# Altium PCB Sheet1.PcbDoc
Units mil, origin at the board's own origin, x right, y up, seen from the top; angles counter-clockwise.
Board outline 6000 x 4000 mil, 2 copper layers (Top Layer, Bottom Layer); 5 components, 36 nets, 92 pads, 16 vias.
Unrouted connection lines stored in the file: 10.
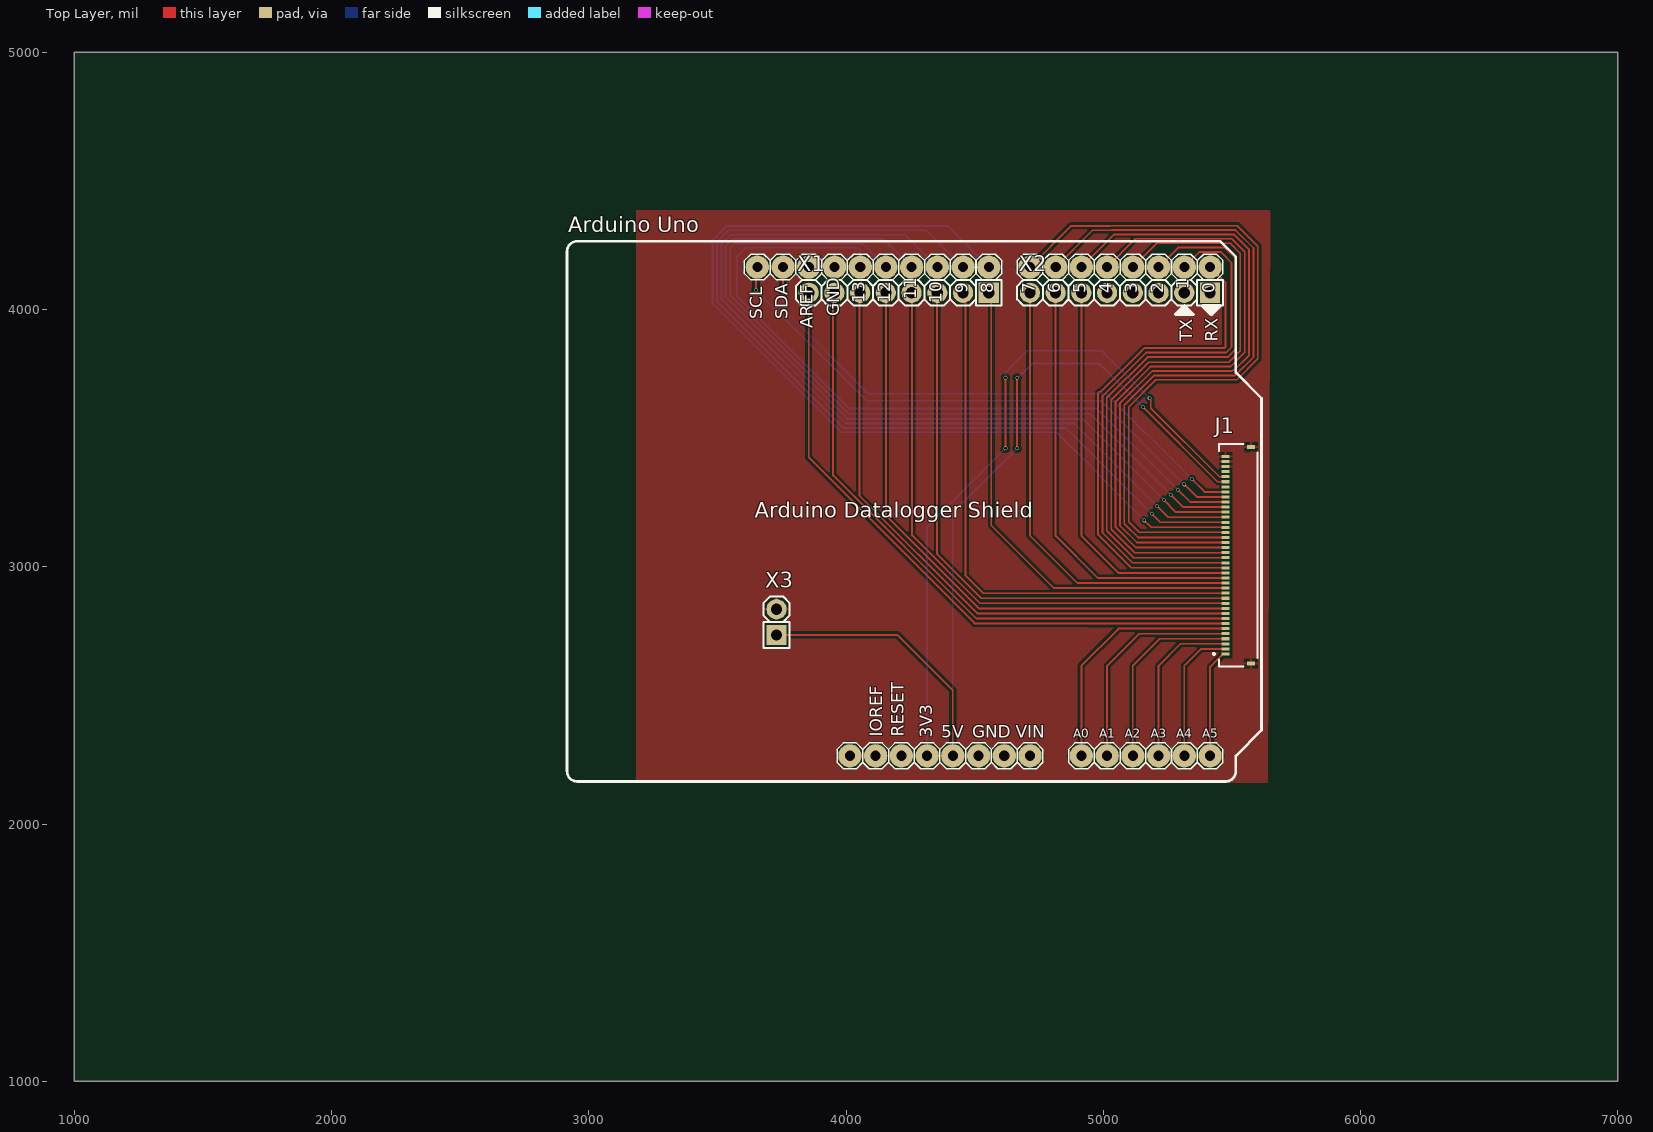
[diagram p0: Top Layer view]
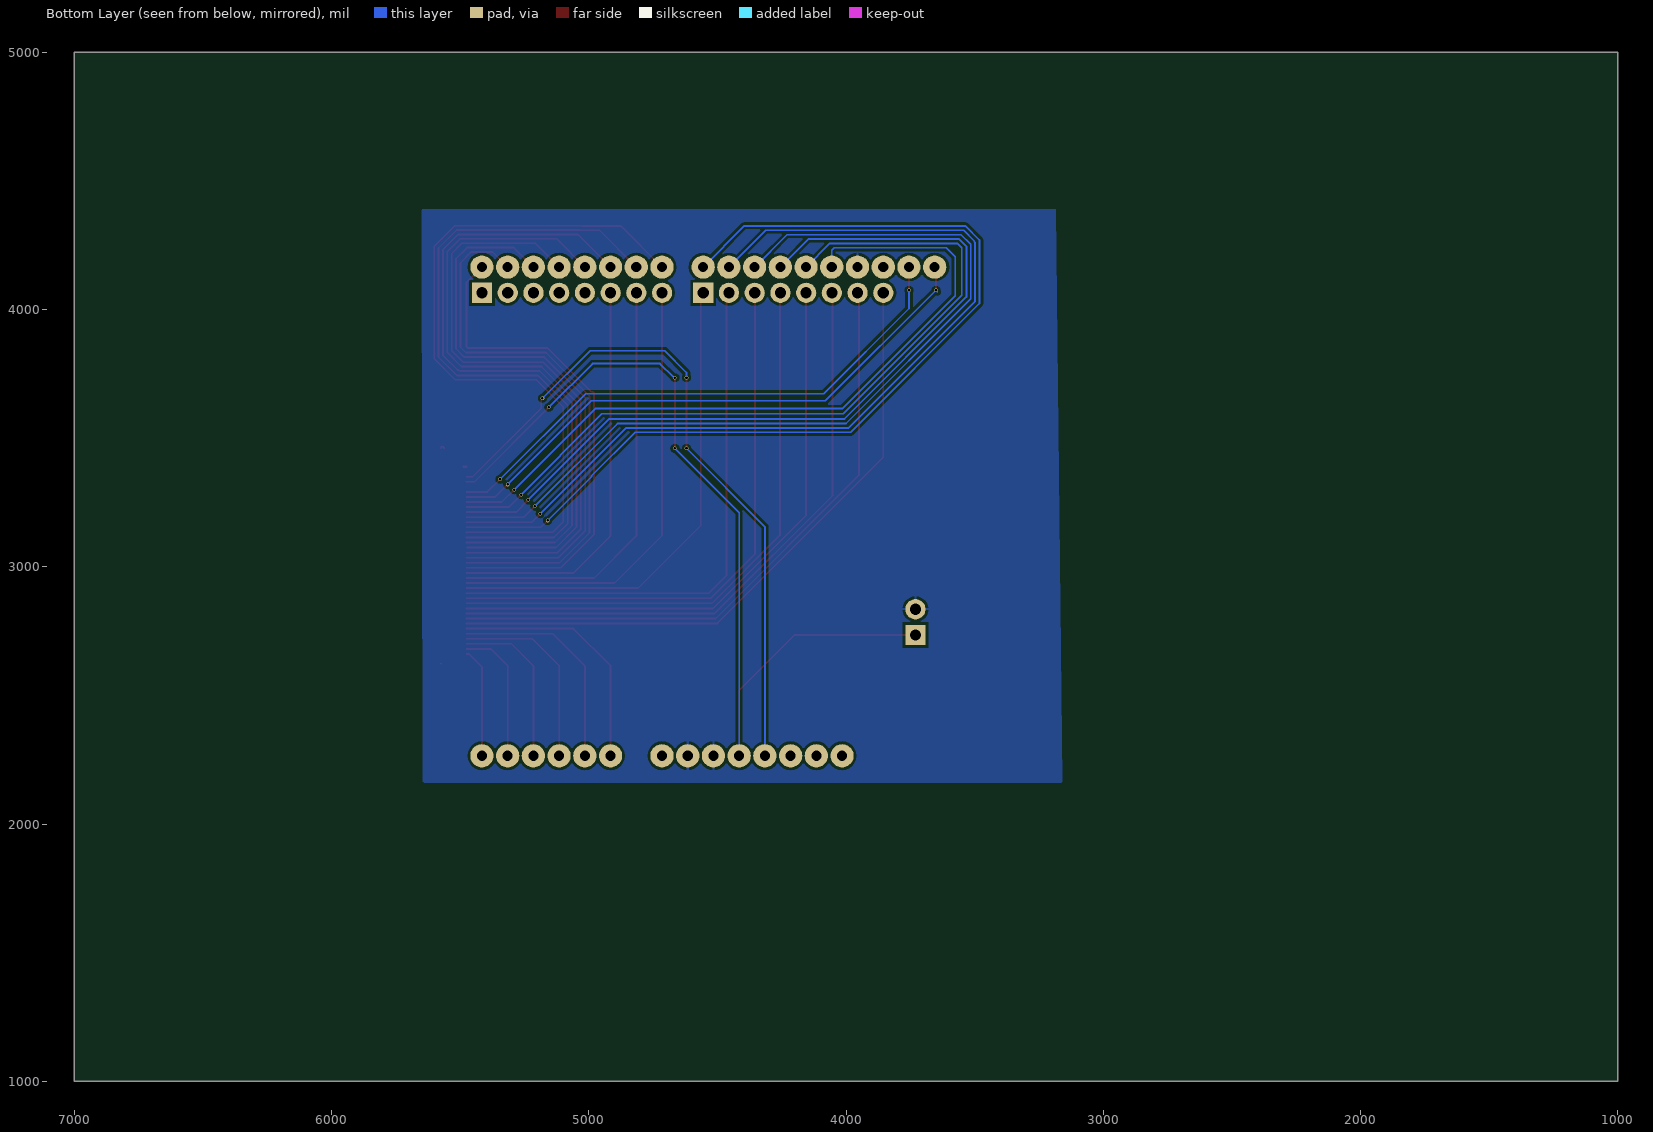
[diagram p1: Bottom Layer view, seen from below]
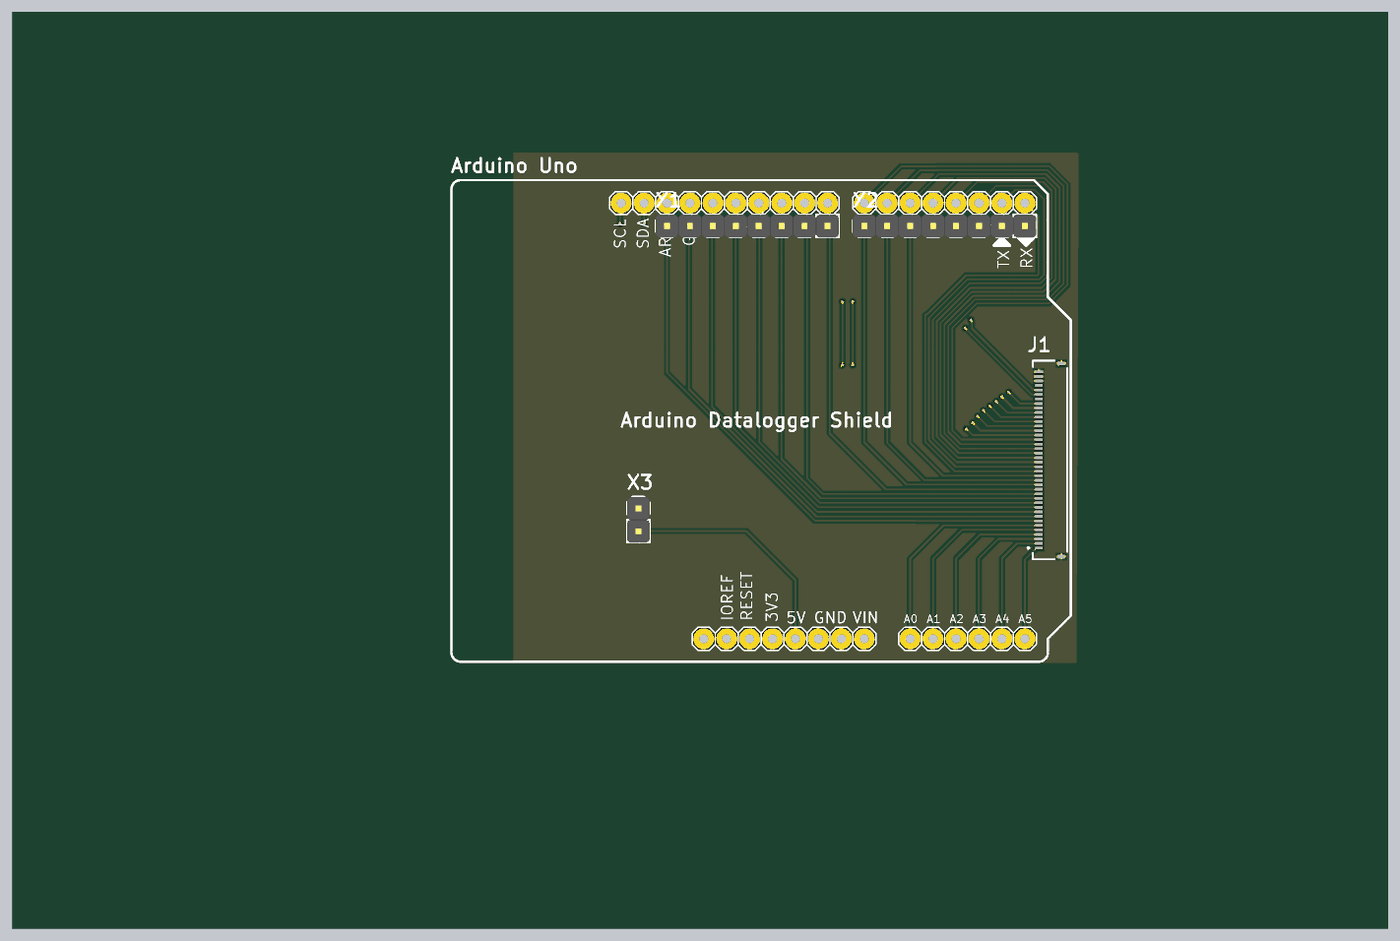
[diagram p2: 3D render of the assembled board from above, using the file's embedded part models]

## Layer stack, top to bottom
Top Solder: solder mask 0.4, Solder Resist, Dk 3.5
Top Layer: signal copper 1.4
Dielectric 1: dielectric 12.6, FR-4, Dk 4.8
Bottom Layer: signal copper 1.4
Bottom Solder: solder mask 0.4, Solder Resist, Dk 3.5

## Board outline
1000,1000 7000,1000 7000,5000 1000,5000

## Design rules (kind name [scope] priority, off if disabled: settings)
Clearance [All] p1: gap=10 ignorepadtopadclearanceinfootprint=FALSE except(0: Arc-Hole Track-Hole SMDPad-Hole THPad-Hole Via-Hole Fill-Hole Poly-Hole Region-Hole Text-Hole)
PolygonConnect [All] p1: connectstyle=Relief reliefconductorwidth=10 reliefentries=4 polygonreliefangle="90 Angle" airgapwidth=10
RoomDefinition Sheet1 [InComponentClass('Sheet1')] p1: confinementstyle=ConfineIn formatcopy=TRUE lockcomponents=FALSE outline 7045,1060 10095,1060 10095,3885 7045,3885
RoutingVias [All] p1: holewidth=10 width=14 viastyle="Through Hole" minholewidth=10 minwidth=14 maxholewidth=10 maxwidth=14
ShortCircuit [All] p1 off: allowed=FALSE
SilkToSolderMaskClearance [IsPad] p1 off: minsilkscreentomaskgap=5 clearancetoexposedcopper=TRUE
SolderMaskExpansion [All] p1: expansion=4 istentingtop=FALSE
Width [All] p1: maxlimit=7 minlimit=7 preferedwidth=7 minimp=50.000000 maximp=50.000000 favimp=50.000000
28 further rules are at their usual default settings.

## Components (designator, comment, footprint, x,y, rotation, side; value= is the part's Value field where it differs from the comment)
"Arduino Uno" "ARDUINO UNO" "ARDUINO UNO" 4335,3210 r0 top
J1 "FFC2B28-40-G" GCT_FFC2B28-40-G 5525,3045 r90 top
X1 "Connector, 8pin, 2.54mm, 500VAC, 3A" "CON: PLS-8" 4205,4065 r180 top
X2 "Connector, 8pin, 2.54mm, 500VAC, 3A" "CON: PLS-8" 5065,4065 r180 top
X3 "Connector, 2pin, 2.54mm, 500VAC, 3A" "CON: PLS-2" 3730,2785 r90 top

## Footprints (in the part's own frame and the unit in brackets; to place one, negate y for a bottom-side part, rotate by r counter-clockwise, add the part's x,y. Pads: shape width x height; smd on the part's side, far side on the other; paste and mask are expansions set on the pad)
"ARDUINO UNO" [mm]
  round 2.3 hole 1: 0(27.44,24.26) 1(24.9,24.26) 2(22.36,24.26) 3(19.82,24.26) 3.3V(-0.5,-24) 4(17.28,24.26) 5(14.74,24.26) 5V(2.04,-24) 6(12.2,24.26) 7(9.66,24.26) 8(5.596,24.26) 9(3.056,24.26) 10(0.516,24.26) 11(-2.024,24.26) 12(-4.564,24.26) 13(-7.104,24.26) A0(14.74,-24) A1(17.28,-24) A2(19.82,-24) A3(22.36,-24) A4(24.9,-24) A5(27.44,-24) AREF(-12.184,24.26) GND1(7.12,-24) GND2(4.58,-24) GND3(-9.644,24.26) IOREF(-5.58,-24) NC(-8.12,-24) RST(-3.04,-24) SCL(-17.264,24.26) SDA(-14.724,24.26) Vin(9.66,-24)
  silkscreen extent -36.06,-26.54 32.52,26.8
"CON: PLS-2" [mm]
  rect 2x2 hole 1.1: 1(-1.27,0)
  round 2 hole 1.1: 2(1.27,0)
  silkscreen extent -2.54,-1.27 2.54,1.27, body extent -2.57,-1.28 2.51,1.26, height 8.54
"CON: PLS-8" [mm] "PLS-40 8 pin header"
  rect 2x2 hole 1.1: 1(-8.89,0)
  round 2 hole 1.1: 2(-6.35,0) 3(-3.81,0) 4(-1.27,0) 5(1.27,0) 6(3.81,0) 7(6.35,0) 8(8.89,0)
  silkscreen extent -10.16,-1.27 10.16,1.27, body extent -10.16,-1.27 10.16,1.27, height 8.54
GCT_FFC2B28-40-G [mm]
  rect 0.3x0.8 smd: 1(-9.75,1.25) 2(-9.25,1.25) 3(-8.75,1.25) 4(-8.25,1.25) 5(-7.75,1.25) 6(-7.25,1.25) 7(-6.75,1.25) 8(-6.25,1.25) 9(-5.75,1.25) 10(-5.25,1.25) 11(-4.75,1.25) 12(-4.25,1.25) 13(-3.75,1.25) 14(-3.25,1.25) 15(-2.75,1.25) 16(-2.25,1.25) 17(-1.75,1.25) 18(-1.25,1.25) 19(-0.75,1.25) 20(-0.25,1.25) 21(0.25,1.25) 22(0.75,1.25) 23(1.25,1.25) 24(1.75,1.25) 25(2.25,1.25) 26(2.75,1.25) 27(3.25,1.25) 28(3.75,1.25) 29(4.25,1.25) 30(4.75,1.25) 31(5.25,1.25) 32(5.75,1.25) 33(6.25,1.25) 34(6.75,1.25) 35(7.25,1.25) 36(7.75,1.25) 37(8.25,1.25) 38(8.75,1.25) 39(9.25,1.25) 40(9.75,1.25)
  rect 0.4x0.8 smd: S1(-10.7,-1.25) S2(10.7,-1.25)
  silkscreen extent -11,-1.9 11,2.5

## Part data
J1: "40 Position FFC, FPC Connector Contacts, Top and Bottom 0.020 _0.50mm_ Surface Mount, Right Angle", Package="Package Analog Devices", Availability=Unavailable, MF="Global Connector Technology", MP=FFC2B28-40-G, Price=None, SnapEDA_Link=https://www.snapeda.com/parts/FFC2B28-40-G/Global%20Connector%20Technology/view-part/4223068/?ref=snap
X1 X2: library part PLS-8, CurrentMax=3A, Manufacturer=Connfly, VoltageMax=500VAC, CommentText="\"Разъем\"", HelpURL=https://www.chipdip.ru/product/pls-8-ds1021-1-8sf112, Multichannel=8pin, PartNumber=PLS-8, Pitch=2.54mm, TypeConnector=Connector, ValueManufacturerPartNumber="Connector, 8pin, 2.54mm, 500VAC, 3A"
X3: library part PLS-2, CurrentMax=3A, Manufacturer=Connfly, VoltageMax=500VAC, CommentText="\"Разъем\"", HelpURL=https://www.chipdip.ru/product/pls-2, Multichannel=2pin, PartNumber=PLS-2, Pitch=2.54mm, TypeConnector=Connector, ValueManufacturerPartNumber="Connector, 2pin, 2.54mm, 500VAC, 3A"

## Via types
v1: diameter 14, hole 10, Top Layer to Bottom Layer, 16 vias

## Nets (pads, with @x,y where several pads share a name; then routed paths per layer and width w, separated by ;. In a path a pad name is that pad's centre, name@x,y a point inside that pad or via, vN(x,y) a via of type N, cw(c..) or ccw(c..) an arc to the next point about the centre after c; other vN are vias at no path point)
GND: "Arduino Uno.GND1" "Arduino Uno.GND2" "Arduino Uno.GND3" J1.38 J1.39 J1.40 J1.S1 J1.S2 X3.2 | length 64
  Top Layer w7: 4510,2270.43 4515.31,2265.12 4515.31,2254.68 ; 4615.31,2254.68 4615.31,2265.12 ; J1.S2@5561.96,3458.85 5561.96,3461.89 5566.34,3466.26 J1.S2 ; J1.S2@5572.71,3463.39 J1.S2@5574.21,3461.89 ; J1.S1 J1.S1@5575,2622.95
  Top Layer w10: J1.38 J1.38@5485.63,3389.49
  Bottom Layer w7: 3949.88,4165.12 3955.32,4165.12
"NetArduino Uno_0": "Arduino Uno.0" J1.18 | length 2004.3
  Top Layer w7: 5415.31,4165.12 5474.79,4105.64 5474.79,3854.1 5470.69,3850 5159.55,3850 4989.55,3680 4984.1,3680 4980,3675.9 4980,3125.21 5109.42,2995.79 J1.18
"NetArduino Uno_1": "Arduino Uno.1" J1.19 | length 2191.9
  Top Layer w7: 5315.31,4165.12 5374.09,4223.89 5456.05,4223.89 5499.02,4180.92 5499.02,3854.29 5477.73,3833 5166.59,3833 4997,3663.41 4997,3132.25 5113.78,3015.47 J1.19
"NetArduino Uno_2": "Arduino Uno.2" J1.20 | length 2303.6
  Top Layer w7: 5215.31,4165.12 5291.09,4240.89 5472.98,4240.89 5516.02,4197.85 5516.02,3847.25 5483.77,3815 5172.63,3815 5014,3656.37 5014,3139.29 5118.13,3035.16 J1.20
"NetArduino Uno_3": "Arduino Uno.3" J1.21 | length 2417.2
  Top Layer w7: 5115.31,4165.12 5208.09,4257.89 5493.06,4257.89 5533.02,4217.94 5533.02,3840.2 5487.82,3795 5176.68,3795 5031,3649.32 5031,3146.33 5122.49,3054.84 J1.21
"NetArduino Uno_3.3V": "Arduino Uno.3.3V" J1.36 | length 2736.4
  Top Layer w7: 4615,3455 v1(4620,3460) v1(4620,3735) ; v1(5180,3655) 5180,3653.11 5185,3648.11 5185,3617.01 5451.89,3350.12 J1.36
  Bottom Layer w7: 4315.31,2265.12 4315.31,3155.32 v1(4620,3460) ; v1(4620,3735) 4620,3755 4705,3840 4995,3840 v1(5180,3655)
"NetArduino Uno_4": "Arduino Uno.4" J1.23 | length 2521.6
  Top Layer w7: 5015.31,4165.12 5125.09,4274.89 5500.11,4274.89 5550.02,4224.98 5550.02,3833.16 5494.86,3778 5183.72,3778 5048,3642.28 5048,3153.37 5126.57,3074.81 5474.44,3074.81
"NetArduino Uno_5": "Arduino Uno.5" J1.22 | length 2631.4
  Top Layer w7: 4915.31,4165.12 5042.09,4291.89 5507.15,4291.89 5567.02,4232.02 5567.02,3822.02 5510,3765 5505.9,3765 5501.9,3761 5190.76,3761 5065,3635.24 5065,3160.42 5131.2,3094.21 5475.79,3094.21
"NetArduino Uno_5V": "Arduino Uno.5V" J1.35 X3.1 | length 3626.3
  Top Layer w7: X3.1 4200,2735 4415,2520 4415,2265.43 4415.31,2265.12 ; v1(4665,3460) v1(4665,3735) ; v1(5155,3620) 5444.29,3330.71 5475.51,3330.71 J1.35
  Bottom Layer w7: 4415.31,2265.12 4415.31,3210.32 v1(4665,3460) ; v1(4665,3735) 4666.89,3735 4670.39,3738.5 4671.92,3738.5 4723.42,3790 4985,3790 v1(5155,3620)
"NetArduino Uno_6": "Arduino Uno.6" J1.25 | length 2737.4
  Top Layer w7: 4815.31,4165.12 4958.2,4308 5034.16,4308 5035.05,4308.89 5514.19,4308.89 5584.02,4239.06 5584.02,3814.98 5513.04,3744 5197.8,3744 5082,3628.2 5082,3167.46 5135.28,3114.18 5475.51,3114.18 5475.79,3113.9
"NetArduino Uno_7": "Arduino Uno.7" J1.24 | length 2843.3
  Top Layer w7: 4715.31,4165.12 4875.2,4325 5027.11,4325 5028.01,4325.89 5521.23,4325.89 5601.02,4246.1 5601.02,3807.94 5520.08,3727 5204.84,3727 5099,3621.16 5099,3174.5 5139.64,3133.86 5475.51,3133.86 5475.79,3133.58
"NetArduino Uno_8": "Arduino Uno.8" J1.26 | length 3767
  Top Layer w7: 4555,4165.43 4555.31,4165.12 ; v1(5160,3180) 5186.73,3153.27 J1.26
  Bottom Layer w7: 4555.31,4165.12 4395.43,4325 3535.96,4325 3481,4270.04 3481,4024 3982,3523 4820,3523 4989.33,3353.67 4989.33,3350.67 v1(5160,3180)
"NetArduino Uno_9": "Arduino Uno.9" J1.27 | length 3614.6
  Top Layer w7: 4455,4175.43 4450,4170.43 4455.31,4165.12 ; v1(5188.23,3206.77) 5222.33,3172.67 5475.51,3172.67 J1.27
  Bottom Layer w7: 4455.31,4165.12 4312.43,4308 3543,4308 3501.44,4266.44 3501.44,4263.56 3498,4260.12 3498,4032 3990,3540 4855,3540 v1(5188.23,3206.77)
"NetArduino Uno_10": "Arduino Uno.10" J1.28 | length 3446.5
  Top Layer w7: 4355,4175.43 4350,4170.43 4355.31,4165.12 ; v1(5210,3235) 5252.36,3192.64 J1.28
  Bottom Layer w7: 4355.31,4165.12 4229.43,4291 3552.92,4291 3515,4253.08 3515,4041.92 3999.92,3557 4888,3557 v1(5210,3235)
"NetArduino Uno_11": "Arduino Uno.11" J1.29 | length 3267.9
  Top Layer w7: 4255,4165.43 4255.31,4165.12 ; v1(5235,3260) 5282.68,3212.32 J1.29
  Bottom Layer w7: 4255.31,4165.12 4146.43,4274 3559.96,4274 3532,4246.04 3532,4048.96 4005.96,3575 4920,3575 v1(5235,3260)
"NetArduino Uno_12": "Arduino Uno.12" J1.30 | length 3103.6
  Top Layer w7: 4155,4165.43 4155.31,4165.12 ; v1(5263.13,3280) 5311.12,3232.01 J1.30
  Bottom Layer w7: 4155.31,4165.12 4063.43,4257 3567,4257 3550,4240 3550,4055 4010,3595 4950,3595 5110.89,3434.11 5110.89,3432.23 v1(5263.13,3280)
"NetArduino Uno_13": "Arduino Uno.13" J1.31 | length 2948.7
  Top Layer w7: 4055,4165.43 4055.32,4165.12 ; v1(5290,3300) 5338.31,3251.69 J1.31
  Bottom Layer w7: 4055.32,4165.12 4055.32,4230.58 4045.9,4240 3610,4240 3575,4205 3575,4054.04 4014.04,3615 4975,3615 v1(5290,3300)
"NetArduino Uno_A0": "Arduino Uno.A0" J1.6 | length 970.7
  Top Layer w7: 4915.31,2265.12 4915,2265.43 4915,2615 5059.57,2759.57 J1.6
"NetArduino Uno_A1": "Arduino Uno.A1" J1.5 | length 862.5
  Top Layer w7: 5015.31,2265.12 5015,2265.43 5015,2615 5139.88,2739.88 J1.5
"NetArduino Uno_A2": "Arduino Uno.A2" J1.4 | length 761
  Top Layer w7: 5115.31,2265.12 5115,2265.43 5115,2269.8 5115,2615 5220.2,2720.2 J1.4
  Top Layer w10: 5115.31,2265.12 5120,2269.8
"NetArduino Uno_A3": "Arduino Uno.A3" J1.3 | length 646.2
  Top Layer w7: 5215.31,2265.12 5215,2265.43 5215,2615 5300.51,2700.51 J1.3
"NetArduino Uno_A4": "Arduino Uno.A4" J1.2 | length 538.1
  Top Layer w7: 5315.31,2265.12 5315,2265.43 5315,2615 5380.83,2680.83 J1.2
"NetArduino Uno_A5": "Arduino Uno.A5" J1.1 | length 427.3
  Top Layer w7: 5415.31,2265.12 5415.31,2610.51 5465.94,2661.14 J1.1
  Top Layer w10: 5415,2265.43 5415.31,2265.12
"NetArduino Uno_SCL": "Arduino Uno.SCL" J1.33 | length 2263.8
  Top Layer w7: v1(3650,4075) 3650,4150.43 3660,4160.43 3655.32,4165.12 ; v1(5315,3320) 5363.62,3271.38 5475.79,3271.38
  Bottom Layer w7: 3645,4068.11 3650,4073.11 v1(3650,4075) 4080,3645 4990,3645 v1(5315,3320)
"NetArduino Uno_SDA": "Arduino Uno.SDA" J1.32 | length 2177.3
  Top Layer w7: v1(3755,4075) 3755,4164.8 3755.32,4165.12 ; v1(5345,3340) 5393.94,3291.06 5475.79,3291.06
  Bottom Layer w7: v1(3755,4075) 3755,4004.1 4086.38,3672.72 5012.28,3672.72 v1(5345,3340)
NetJ1_7: J1.7 X1.8 | length 2528.3
  Top Layer w7: X1.8 3855,3425 4500,2780 4940.04,2780 4940.51,2779.53 5475.51,2779.53 J1.7
NetJ1_8: J1.8 X1.7 | length 2447.2
  Top Layer w7: X1.7@3950,4046.09 3950,3355 4506.06,2798.94 J1.8
NetJ1_9: J1.9 X1.6 | length 2381.8
  Top Layer w7: X1.6@4052.02,4044.83 4052.02,3277.02 4510.42,2818.62 J1.9 J1.9@5475.51,2818.9
NetJ1_10: J1.10 X1.5 | length 2314.8
  Top Layer w7: X1.5@4155,4044.23 4155,3200 4516.69,2838.31 J1.10
NetJ1_11: J1.11 X1.4 | length 2252.3
  Top Layer w7: X1.4@4257.02,4043.89 4257.02,3122.02 4520.77,2858.27 5475.51,2858.27 J1.11
  Top Layer w10: 3955,4065 3956.64,4063.36
NetJ1_12: J1.12 X1.3 | length 2211.5
  Top Layer w7: X1.3 4354.04,4064.04 4354.04,3049.04 4525.41,2877.68 J1.12
  Top Layer w10: 4053.28,4063.28 4055,4065
NetJ1_13: J1.13 X1.2 | length 2146.6
  Top Layer w7: X1.2 4465,4055 4465,2965 4532.92,2897.08 5475.51,2897.08 J1.13
  Top Layer w10: 4155,4065 4157.43,4062.57
NetJ1_14: J1.14 X1.1 | length 1925.1
  Top Layer w7: X1.1 4565,4055 4565,3160.5 4808.46,2917.05 J1.14
  Top Layer w10: 4251.57,4061.57 4255,4065
NetJ1_15: J1.15 X2.8 | length 1780.7
  Top Layer w7: X2.8 4715,3121.67 4899.65,2937.01 5475.51,2937.01 J1.15
NetJ1_16: J1.16 X2.7 | length 1673.5
  Top Layer w7: X2.7 4815,3120 4978.58,2956.42 J1.16
NetJ1_17: J1.17 X2.6 | length 1565.4
  Top Layer w7: X2.6 4915,3120 5058.9,2976.1 J1.17
pads on no net: "Arduino Uno.AREF" "Arduino Uno.IOREF" "Arduino Uno.NC" "Arduino Uno.RST" "Arduino Uno.Vin" J1.34 J1.37 X2.1 X2.2 X2.3 X2.4 X2.5

## Polygon pours and split planes (outlines as drawn)
GND on Bottom Layer "GND_L02_P003" (solid, pour order 3): 5650,4390 3435,4390 3185,4390 3160,2160 5640,2160 5645,2165
GND on Top Layer "GND_L01_P004" (solid, pour order 4): 5650,4380 5645,4385 3185,4385 3185,2180 3180,2175 3195,2160 5640,2160 5640,2170

## Text inside footprints (layer, text, board x,y; h text height)
"Arduino Uno": Top Overlay "5V" at 4370.31,2335.12 h47.6; Top Overlay "A0" at 4884.31,2336.12 h34; Top Overlay "AREF" at 3869.9,3926.64 h47.6 r90; Top Overlay "GND" at 3973.9,3973.23 h47.6 r90; Top Overlay "RESET" at 4225.31,2340.12 h47.6 r90; Top Overlay "3V3" at 4335.31,2335.12 h47.6 r90; Top Overlay "A1" at 4984.31,2336.12 h34; Top Overlay "A2" at 5084.31,2336.12 h34; Top Overlay "A3" at 5184.31,2336.12 h34; Top Overlay "A4" at 5284.31,2336.12 h34; Top Overlay "A5" at 5384.31,2336.12 h34; Top Overlay "VIN" at 4660.31,2335.12 h47.6; Top Overlay "GND" at 4491.31,2335.12 h47.6; Top Overlay "IOREF" at 4140.31,2340.12 h47.6 r90; Top Overlay "TX" at 5345.31,3876.12 h47.6 r90; Top Overlay "RX" at 5445.31,3875.12 h47.6 r90; Top Overlay "13" at 4072.9,4023.74 h47.6 r90; Top Overlay "12" at 4172.9,4023.74 h47.6 r90; Top Overlay "11" at 4272.9,4039.6 h47.6 r90; Top Overlay "10" at 4372.9,4023.74 h47.6 r90; Top Overlay "9" at 4472.9,4063.39 h47.6 r90; Top Overlay "8" at 4572.9,4063.39 h47.6 r90; Top Overlay "7" at 4732.9,4063.39 h47.6 r90; Top Overlay "6" at 4832.9,4063.39 h47.6 r90; Top Overlay "5" at 4932.9,4063.39 h47.6 r90; Top Overlay "4" at 5032.9,4063.39 h47.6 r90; Top Overlay "3" at 5132.9,4063.39 h47.6 r90; Top Overlay "2" at 5232.9,4063.39 h47.6 r90; Top Overlay "1" at 5332.9,4079.26 h47.6 r90; Top Overlay "0" at 5432.9,4063.39 h47.6 r90; Top Overlay "SCL" at 3673.58,3961.97 h47.6 r90; Top Overlay "SDA" at 3773.13,3961.46 h47.6 r90; Top Overlay "Arduino Datalogger Shield" at 3646.02,3190.32 h60